# Altium PCB Copy of Copy of PCB3.PcbDoc
Units mil, origin at the board's own origin, x right, y up, seen from the top; angles counter-clockwise.
Board outline 2980 x 1220 mil, 2 copper layers (Top Layer, Bottom Layer); 62 components, 43 nets, 192 pads, 9 vias.
Unrouted connection lines stored in the file: 50.
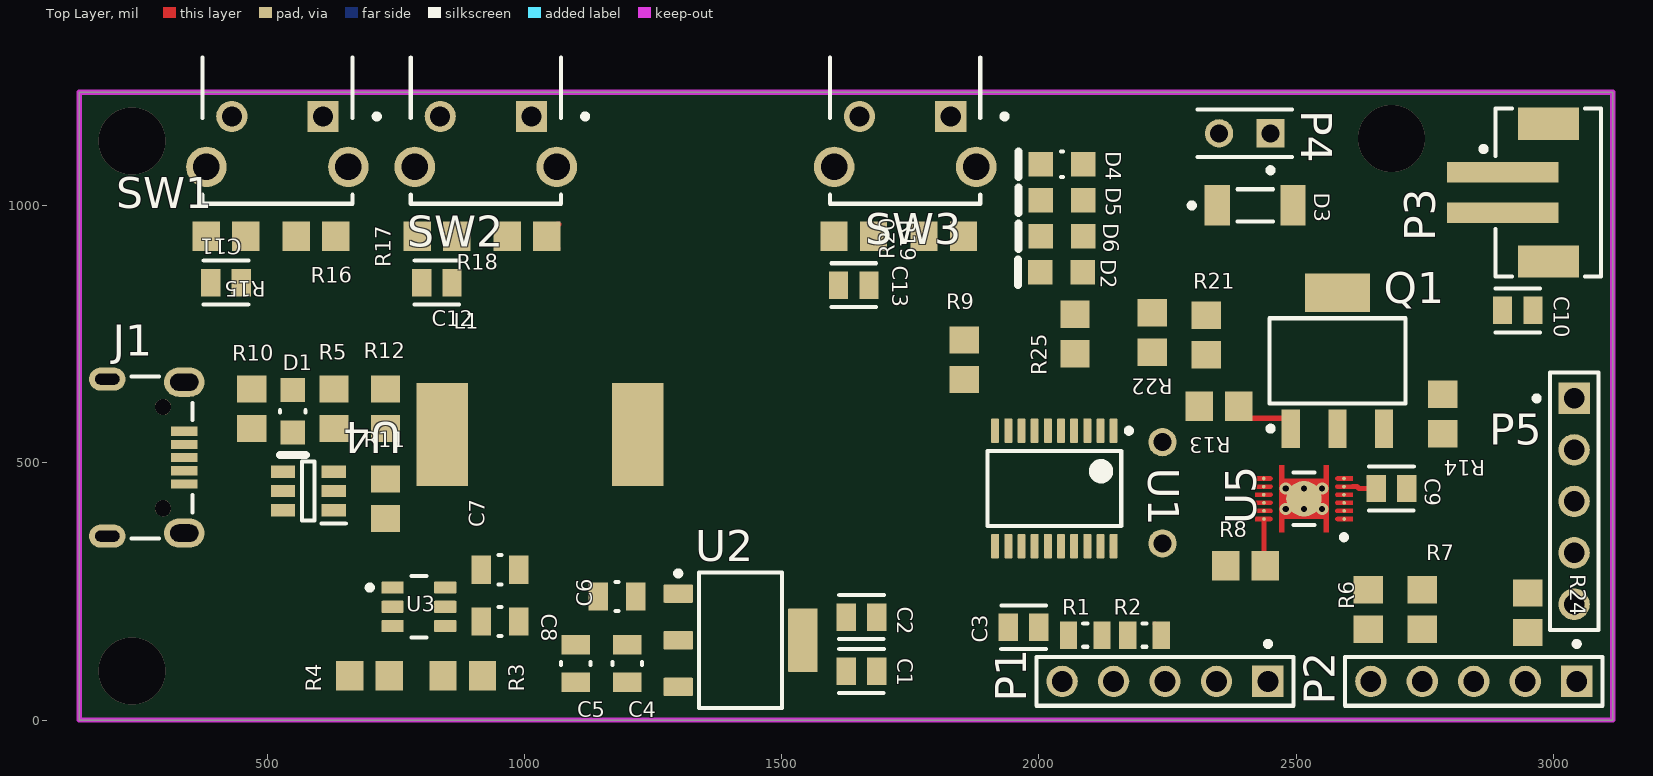
[diagram p0: Top Layer view]
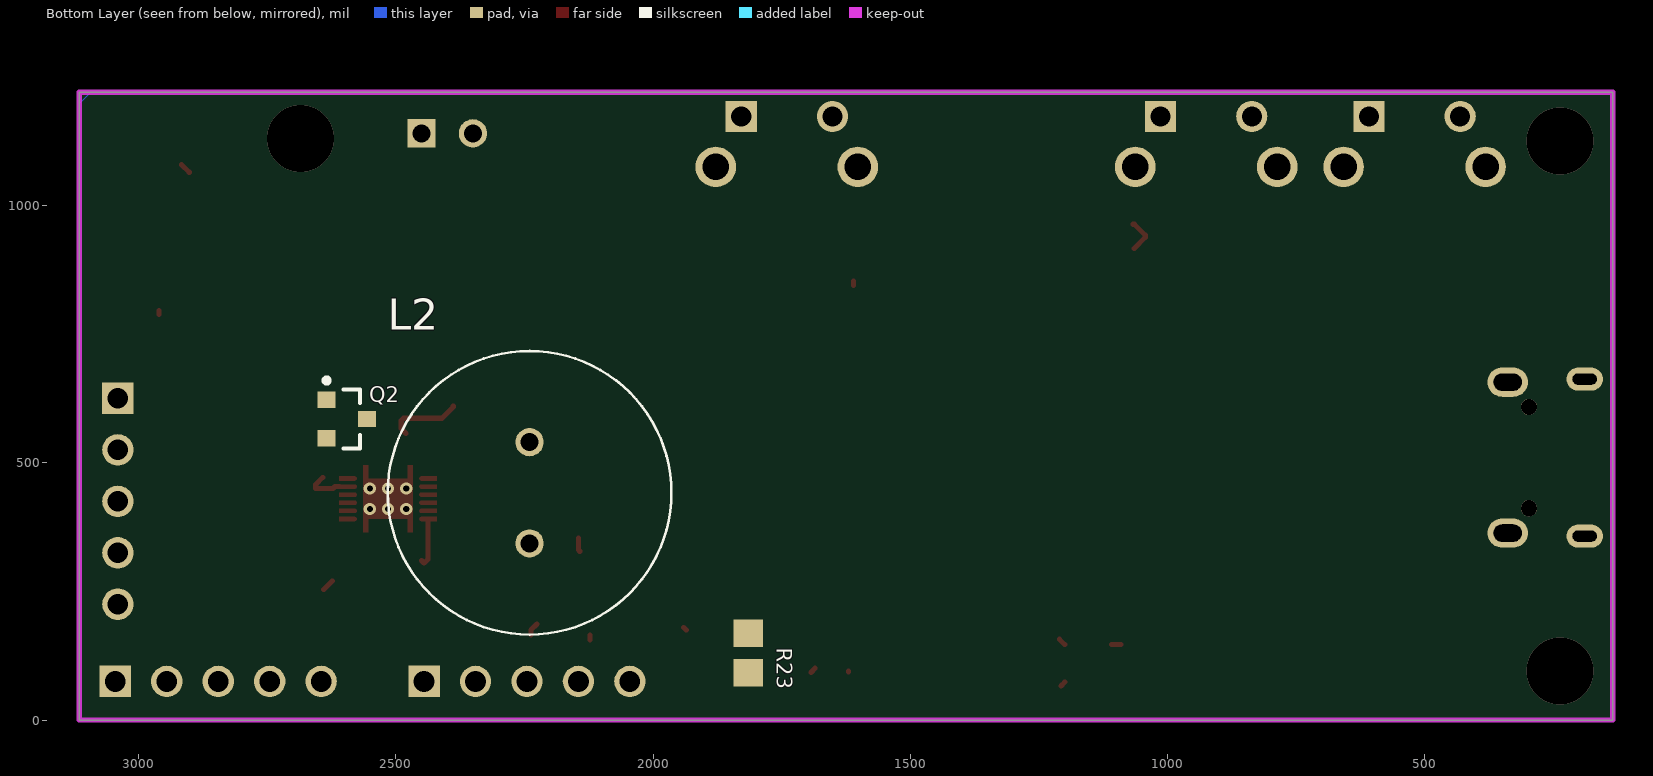
[diagram p1: Bottom Layer view, seen from below]

## Layer stack, top to bottom
Top Solder: solder mask 0.4, Solder Resist, Dk 3.5
Top Layer: signal copper 1.4
Dielectric 1: dielectric 12.6, FR-4, Dk 4.8
Bottom Layer: signal copper 1.4
Bottom Solder: solder mask 0.4, Solder Resist, Dk 3.5

## Board outline
135,0 3115,0 3115,1220 135,1220

## Design rules (kind name [scope] priority, off if disabled: settings)
Clearance [All] p1: gap=8 ignorepadtopadclearanceinfootprint=FALSE except(6: Arc-Arc Arc-Track Arc-SMDPad Arc-THPad Arc-Fill Arc-Poly Arc-Region Track-Track Track-SMDPad Track-THPad Track-Fill Track-Poly Track-Region SMDPad-SMDPad SMDPad-THPad SMDPad-Fill SMDPad-Poly SMDPad-Region THPad-THPad Fill-Fill Fill-Poly Fill-Region Poly-Poly Poly-Region Region-Region; 10: Fill-Hole Poly-Hole Region-Hole)
PolygonConnect [All] p1: connectstyle=Relief reliefconductorwidth=10 reliefentries=4 polygonreliefangle="90 Angle" airgapwidth=10
RoutingVias [All] p1: holewidth=28 width=50 viastyle="Through Hole" minholewidth=12 minwidth=20 maxholewidth=28 maxwidth=50
SolderMaskExpansion [All] p1: expansion=4 istentingtop=FALSE
Width [All] p1: maxlimit=10 minlimit=10 preferedwidth=10
30 further rules are at their usual default settings.

## Classes and differential pairs
component class "Power Supply": C4 C5 C6 C7 C8 L1 R3 R4 U2 U3
component class MotorControl: D3 R13 R14
component class MCU: C1 C2 C3 C11 C12 C13 D4 D5 D6 LS P1 P2 Q2 R1 R2 R15 R16 R17 R18 R19 R20 R22 R24 R25 SW1 SW2 SW3 U1
component class BatteryControl: C9 C10 D1 D2 J1 P3 R5 R6 R7 R8 R9 R10 R11 R12 U4

## Components (designator, comment, footprint, x,y, rotation, side; value= is the part's Value field where it differs from the comment)
C1 "10 uF" FP-C0805C-DG-MFG 1655,95 r180 top value=10uF
C2 "0.1 uF" FP-C0805C-DG-MFG 1655,200 r180 top value=10uF
C3 "1.1 nF" FP-C0805C-DG-MFG 1970,180 r180 top value=10uF
C4 "4.7uF" FP-CC0805-0_85-MFG 1200,110 r90 top value="100 nF"
C5 "470nF" FP-CC0805-0_85-MFG 1100,110 r90 top value="100 nF"
C6 "4.7uF" FP-CC0805-0_85-MFG 1180,240 r180 top value="100 nF"
C7 "1uF" FP-CC0805-0_85-MFG 952.65,292.02 r0 top value="100 nF"
C8 "4.7uF" FP-CC0805-0_85-MFG 952.65,191.46 r180 top value="100 nF"
C9 "0.47 uF" FP-C0805C-DG-MFG 2685,450 r0 top value=10uF
C10 "1 nF" FP-C0805C-DG-MFG 2930.47,796.06 r0 top value=10uF
C11 "0.1uF" FP-C0805C-DG-MFG 420,850 r180 top value=10uF
C12 "0.1uF" FP-C0805C-DG-MFG 830,850 r180 top value=10uF
C13 "0.1uF" FP-C0805C-DG-MFG 1640,845 r180 top value=10uF
D1 "LTST-C170KRKT" LTST-C170KRKT_V 550,600 r270 top
D2 "HSMG-C170" AVAG-HSMX-C170_V 2043.66,870 r180 top
D3 "LS4148-GS18" FP-6_560-5006_01-4-MFG 2420,1000 r0 top value=4pF
D4 "LTST-C170KRKT" LTST-C170KRKT_V 2045,1080 r180 top
D5 "HSMG-C170" AVAG-HSMX-C170_V 2045,1010 r180 top
D6 "HSMG-C170" AVAG-HSMX-C170_V 2045,940 r180 top
J1 "629105150521" 629105150521 225,510 r270 top
L1 "Bourns SRU1048-100Y" "Bourns SRU1048-100Y-Footprint-1" 1030,550 r0 top
L2 "Comment" BUZZER_PS1440P02BT 2240,441.57 r180 bottom locked
P1 "77311-462K05LF" FCI-77311-5_V 2245,75 r180 top
P2 "77311-462K05LF" FCI-77311-5_V 2845,75 r180 top
P3 "620302124022" 620302124022 2990,1025 r90 top
P4 "5-146280-2" TECO-5-146280-2_V 2400,1140 r180 top
P5 "77311-462K05LF" FCI-77311-5_V 3040,425 r270 top
Q1 "BSP89" INF-PG-SOT223_SC-73_M 2580,698.11 r90 top
Q2 "MMBTA06LT1G" ONSC-SOT-23-3-318-08_V 2595,585 r180 bottom
R1 "47k" RESC2013X50X30LL20T20 2090,165 r0 top
R2 "1k" RESC2013X50X30LL20T20 2205,165 r180 top
R3 "Resistor 1k +/-1% 0805 125 mW" RESC2013X70X40ML20T20 880.31,85.97 r0 top value=1M
R4 "Resistor 1k +/-1% 0805 125 mW" RESC2013X70X40ML20T20 699.05,85.97 r0 top value=71.5k
R5 "Resistor 1k +/-1% 0805 125 mW" RESC2013X70X40ML20T20 630,605 r270 top value=470
R6 "Resistor 1k +/-1% 0805 125 mW" RESC2013X70X40ML20T20 2640,215 r90 top value=4.7k
R7 "Resistor 1k +/-1% 0805 125 mW" RESC2013X70X40ML20T20 2745,215 r90 top value=4.7k
R8 "Resistor 1k +/-1% 0805 125 mW" RESC2013X70X40ML20T20 2401.61,300 r180 top value=10k
R9 "Resistor 1k +/-1% 0805 125 mW" RESC2013X70X40ML20T20 1855,700 r270 top value=470
R10 "Resistor 1k +/-1% 0805 125 mW" RESC2013X70X40ML20T20 470,605 r90 top value=10k
R11 "Resistor 1k +/-1% 0805 125 mW" RESC2013X70X40ML20T20 730,430 r90 top value=10k
R12 "Resistor 1k +/-1% 0805 125 mW" RESC2013X70X40ML20T20 730,605 r270 top value=0.01
R13 "Resistor 1k +/-1% 0805 125 mW" RESC2013X70X40ML20T20 2350,610 r180 top value=220
R14 "Resistor 1k +/-1% 0805 125 mW" RESC2013X70X40ML20T20 2785,595 r90 top value=10k
R15 "Resistor 1k +/-1% 0805 125 mW" RESC2013X70X40ML20T20 420,940 r0 top value=10k
R16 "Resistor 1k +/-1% 0805 125 mW" RESC2013X70X40ML20T20 595,940 r0 top value=1k
R17 "Resistor 1k +/-1% 0805 125 mW" RESC2013X70X40ML20T20 830,940 r0 top value=10k
R18 "Resistor 1k +/-1% 0805 125 mW" RESC2013X70X40ML20T20 1005,940 r0 top value=1k
R19 "Resistor 1k +/-1% 0805 125 mW" RESC2013X70X40ML20T20 1640,940 r0 top value=10k
R20 "Resistor 1k +/-1% 0805 125 mW" RESC2013X70X40ML20T20 1815,940 r0 top value=1k
R21 "Resistor 1k +/-1% 0805 125 mW" RESC2013X70X40ML20T20 2325,748.39 r270 top value=470
R22 "Resistor 1k +/-1% 0805 125 mW" RESC2013X70X40ML20T20 2220,753.39 r270 top value=470
R23 "Resistor 1k +/-1% 0805 125 mW" RESC2013X70X40ML20T20 1815,130 r90 bottom value=1k
R24 "Resistor 1k +/-1% 0805 125 mW" RESC2013X70X40ML20T20 2950,208.39 r90 top value=1k
R25 "Resistor 1k +/-1% 0805 125 mW" RESC2013X70X40ML20T20 2070,750 r270 top value=470
SW1 "1825027-5" FP-1825027-5-0 520,1170 r180 top
SW2 "1825027-5" FP-1825027-5-0 925,1170 r180 top
SW3 "1825027-5" FP-1825027-5-0 1740,1170 r180 top
U1 "MSP430G2553IPW20" PW0020A_L 2030,450 r270 top
U2 "LM340MP-5.0/NOPB" DCY0004A_L 1420,155 r0 top
U3 "TLV61046ADBVT" FP-DBV0006A-MFG 795,220 r0 top
U4 "BQ21040DBVT" SOT95P280X145-6N 580,445 r180 top
U5 "BQ27441DRZR-G1A" FP-DRZ0012A-MFG 2515,430 r90 top

## Footprints (in the part's own frame and the unit in brackets; to place one, negate y for a bottom-side part, rotate by r counter-clockwise, add the part's x,y. Pads: shape width x height; smd on the part's side, far side on the other; paste and mask are expansions set on the pad)
620302124022 [mm] "2.00mm SMT Male Vertical Shrouded Header, 2p"
  rect 1x5.5 smd: 1(1,2.25) 2(-1,2.25)
  rect 1.6x3 smd: MP1(-3.4,0) MP2(3.4,0)
  silkscreen extent -4.15,-2.6 4.15,3.32, body extent -4,-2.5 4,4.51, height 6.77
629105150521 [mm] "Micro USB 2.0 SMT Type B Horizontal 5 Contacts High Current"
  rect 0.45x1.3 smd: 1(-1.3,2.9) 2(-0.65,2.9) 3(0,2.9) 4(0.65,2.9) 5(1.3,2.9)
  round 0.8 hole 0.8 unplated: MH1(-2.5,1.85) MH2(2.5,1.85)
  oval 1.15x1.8 hole 0.55 slot 1.2 at 90 deg: Shell(-3.875,-0.9) Shell(3.875,-0.9)
  oval 1.45x2 hole 0.85 slot 1.4 at 90 deg: Shell(-3.725,2.9) Shell(3.725,2.9)
  silkscreen extent -4,0.3 4,3.3, body extent -4,-3.3 4,3.3, height 2.75
AVAG-HSMX-C170_V [mm] "SMD, 2-Leads, Body 2x1.25mm, Height 0.8mm"
  rect 1.2x1.2 smd: 1(-1.05,0) 2(1.05,0)
  silkscreen extent 2.15,-0.63 2.15,0.63, body extent -1,-0.63 1,0.63, height 0.8
"Bourns SRU1048-100Y-Footprint-1" [mil]
  rect 100x200 smd: 1(190,5) 2(-190,5)
  body extent -197,-197 197,197, height 189
BUZZER_PS1440P02BT [mm]
  round 1.398 hole 0.89: 1(0,2.5) 2(0,-2.5)
  silkscreen extent -7,-7 7,7
DCY0004A_L [mm] "SOT223, 4-Leads, Body 6.7x3.7mm, Pitch 2.3mm, IPC High Density"
  rrect11% 1.45x0.9 smd: 1(-3.075,2.3) 2(-3.075,0) 3(-3.075,-2.3)
  rrect7% 1.45x3.15 smd: 4(3.075,0)
  silkscreen extent -3.2,-3.35 2.05,3.42, body extent -3.5,-3.25 3.5,3.25, height 1.62
FCI-77311-5_V [mm] "THD, 5-Leads, Body 12.7x2.4mm, Pitch 2.54mm"
  rect 1.55x1.55 hole 1.02: 1(-5.08,0)
  round 1.55 hole 1.02: 2(-2.54,0) 3(0,0) 4(2.54,0) 5(5.08,0)
  silkscreen extent -6.35,-1.97 6.35,1.2, body extent -6.35,-1.2 6.35,1.2, height 16.24
FP-6_560-5006_01-4-MFG [mm]
  rect 1.25x2 smd paste+0 mask+0: 1(-1.875,0) 2(1.875,0)
  silkscreen extent -3.25,-0.8 0.87,0.8, body extent -2.6,-1.1 2.6,1.1, height 0.25
FP-1825027-5-0 [mm]
  rect 1.54x1.54 hole 0.99 paste-1000 mask+0: 1(-2.25,-0.075)
  round 1.54 hole 0.99 paste-1000 mask+0: 2(2.25,-0.075)
  round 2 hole 1.3 paste-1000 mask+0: 3(-3.505,2.415) 4(3.505,2.415)
  silkscreen extent -5.03,-3 3.7,4.23, body extent -4.6,-4.34 4.6,4.33, height 0.25
FP-C0805C-DG-MFG [mm]
  rect 0.95x1.35 smd paste+0 mask+0: 1(-0.75,0) 2(0.75,0)
  silkscreen extent -1.11,-1.08 1.1,1.07, body extent -1.4,-0.85 1.4,0.85, height 0.25
FP-CC0805-0_85-MFG [mm]
  rect 0.95x1.4 smd paste+0 mask+0: 1(-0.925,0) 2(0.925,0)
  silkscreen extent -0.08,-0.72 0.08,0.72, body extent -1.6,-1.05 1.6,1.05, height 0.25
FP-DBV0006A-MFG [mm]
  rrect17% 1.1x0.6 smd paste+0 mask+0: 1(-1.3,0.95) 2(-1.3,0) 3(-1.3,-0.95) 4(1.3,-0.95) 5(1.3,0) 6(1.3,0.95)
  silkscreen extent -2.55,-1.53 0.38,1.53, body extent -1.95,-1.78 1.95,1.78, height 0.25
FP-DRZ0012A-MFG [mm]
  round 0.18 smd paste-1000 mask+0: 1(-1,-1.985) 2(-0.6,-1.985) 3(-0.2,-1.985) 4(0.2,-1.975) 5(0.6,-1.975) 6(1,-1.975) 7(1,1.985) 8(0.6,1.985) 9(0.2,1.985) 10(-0.2,1.975) 11(-0.6,1.975) 12(-1,1.975)
  round 1.755 smd paste-1000 mask+0: 13(0,0)
  Top Layer region: -1.1,-2.4 -1.1,-1.65 -1.092,-1.612 -1.071,-1.579 -1.038,-1.558 -1,-1.55 -1,-1.55 -0.962,-1.558 -0.929,-1.579 -0.908,-1.612 -0.9,-1.65 -0.9,-1.65 -0.9,-2.4
  Top Layer region: -0.7,-2.4 -0.7,-1.65 -0.692,-1.612 -0.671,-1.579 -0.638,-1.558 -0.6,-1.55 -0.6,-1.55 -0.562,-1.558 -0.529,-1.579 -0.508,-1.612 -0.5,-1.65 -0.5,-1.65 -0.5,-2.4
  Top Layer region: -0.3,-2.4 -0.3,-1.65 -0.292,-1.612 -0.271,-1.579 -0.238,-1.558 -0.2,-1.55 -0.2,-1.55 -0.162,-1.558 -0.129,-1.579 -0.108,-1.612 -0.1,-1.65 -0.1,-1.65 -0.1,-2.4
  Top Layer region: 0.1,-2.4 0.1,-1.65 0.108,-1.612 0.129,-1.579 0.162,-1.558 0.2,-1.55 0.2,-1.55 0.238,-1.558 0.271,-1.579 0.292,-1.612 0.3,-1.65 0.3,-1.65 0.3,-2.4
  Top Layer region: 0.5,-2.4 0.5,-1.65 0.508,-1.612 0.529,-1.579 0.562,-1.558 0.6,-1.55 0.6,-1.55 0.638,-1.558 0.671,-1.579 0.692,-1.612 0.7,-1.65 0.7,-1.65 0.7,-2.4
  Top Layer region: 0.9,-2.4 0.9,-1.65 0.908,-1.612 0.929,-1.579 0.962,-1.558 1,-1.55 1,-1.55 1.038,-1.558 1.071,-1.579 1.092,-1.612 1.1,-1.65 1.1,-1.65 1.1,-2.4
  Top Layer region: 1.1,2.4 1.1,1.65 1.087,1.6 1.05,1.563 1,1.55 1,1.55 0.962,1.558 0.929,1.579 0.908,1.612 0.9,1.65 0.9,1.65 0.9,2.4
  Top Layer region: 0.7,2.4 0.7,1.65 0.687,1.6 0.65,1.563 0.6,1.55 0.6,1.55 0.562,1.558 0.529,1.579 0.508,1.612 0.5,1.65 0.5,1.65 0.5,2.4
  Top Layer region: 0.3,2.4 0.3,1.65 0.287,1.6 0.25,1.563 0.2,1.55 0.2,1.55 0.162,1.558 0.129,1.579 0.108,1.612 0.1,1.65 0.1,1.65 0.1,2.4
  Top Layer region: -0.1,2.4 -0.1,1.65 -0.113,1.6 -0.15,1.563 -0.2,1.55 -0.2,1.55 -0.238,1.558 -0.271,1.579 -0.292,1.612 -0.3,1.65 -0.3,1.65 -0.3,2.4
  Top Layer region: -0.5,2.4 -0.5,1.65 -0.513,1.6 -0.55,1.563 -0.6,1.55 -0.6,1.55 -0.638,1.558 -0.671,1.579 -0.692,1.612 -0.7,1.65 -0.7,1.65 -0.7,2.4
  Top Layer region: -0.9,2.4 -0.9,1.65 -0.913,1.6 -0.95,1.563 -1,1.55 -1,1.55 -1.038,1.558 -1.071,1.579 -1.092,1.612 -1.1,1.65 -1.1,1.65 -1.1,2.4
  Top Layer region: -1.65,1.225 1.65,1.225 1.65,0.975 0.975,0.975 0.975,-0.975 1.65,-0.975 1.65,-1.225 -1.65,-1.225 -1.65,-0.975 -0.975,-0.975 -0.975,0.975 -1.65,0.975 -1.65,1.225
  silkscreen extent -2.02,-2.1 1.3,0.53, body extent -1.75,-2.5 1.75,2.5, height 0.25
INF-PG-SOT223_SC-73_M [mm] "SOT223, 4-Leads, Body 6.5x3.5mm, Pitch 2.3mm, IPC Low Density"
  rect 1.9x0.9 smd: 1(-3.35,2.3) 2(-3.35,0) 3(-3.35,-2.3)
  rect 1.9x3.2 smd: 4(3.35,0)
  silkscreen extent -3.47,-3.35 2.1,3.42, body extent -1.85,-3.35 1.85,3.35, height 1.8
LTST-C170KRKT_V [mm] "SMD, 2-Leads, Body 2x1.25mm"
  rect 1.2x1.2 smd: 1(-1.05,0) 2(1.05,0)
  silkscreen extent -0.05,-0.63 2.16,0.64, body extent -1,-0.63 1,0.63, height 1.2
ONSC-SOT-23-3-318-08_V [mm] "SOT23, 3-Leads, Body 2.92x1.3mm, Pitch 0.95mm"
  rect 0.9x0.8 smd: 1(-1,0.95) 2(-1,-0.95) 3(1,0)
  silkscreen extent -1.13,-1.46 0.65,2.02, body extent -0.65,-1.46 0.65,1.46, height 1.11
PW0020A_L [mm] "SOP, 20-Leads, Body 6.6x4.5mm, Pitch 0.65mm, IPC High Density"
  rrect25% 1.2x0.4 smd: 1(-2.85,2.925) 2(-2.85,2.275) 3(-2.85,1.625) 4(-2.85,0.975) 5(-2.85,0.325) 6(-2.85,-0.325) 7(-2.85,-0.975) 8(-2.85,-1.625) 9(-2.85,-2.275) 10(-2.85,-2.925) 11(2.85,-2.925) 12(2.85,-2.275) 13(2.85,-1.625) 14(2.85,-0.975) 15(2.85,-0.325) 16(2.85,0.325) 17(2.85,0.975) 18(2.85,1.625) 19(2.85,2.275) 20(2.85,2.925)
  silkscreen extent -2.97,-3.3 1.85,3.8, body extent -3.21,-3.25 3.21,3.25, height 1
RESC2013X50X30LL20T20 [mm] "Chip Resistor, 2-Leads, Body 2.00x1.25mm, IPC High Density"
  rect 0.85x1.35 smd: 1(-0.825,0) 2(0.825,0)
  silkscreen extent -0.1,-0.58 0.1,0.58, body extent -1.1,-0.72 1.1,0.72, height 0.5
RESC2013X70X40ML20T20 [mm] "Chip Resistor, 2-Leads, Body 2.2x1.35mm, IPC Low Density"
  rect 1.35x1.45 smd: 1(-0.975,0) 2(0.975,0)
  body extent -1.1,-0.67 1.1,0.67, height 0.7
SOT95P280X145-6N [mm]
  rect 1.2x0.6 smd: 1(-1.25,0.95) 2(-1.25,0) 3(-1.25,-0.95) 4(1.25,-0.95) 5(1.25,0) 6(1.25,0.95)
  silkscreen extent -1.85,-1.45 0.3,1.6, body extent -1.4,-1.45 1.4,1.45, height 1.45
TECO-5-146280-2_V [mm] "Connector, 2-Leads, Body 4.67x2.34mm, Pitch 2.54mm"
  rect 1.4x1.4 hole 0.89: 1(-1.27,0)
  round 1.4 hole 0.89: 2(1.27,0)
  silkscreen extent -2.33,-1.17 2.33,1.94, body extent -2.34,-1.17 2.34,1.17, height 5.33

## Part data
C1 C2 C3 C9 C10 C11 C12 C13: library part CMP-2007-03243-2, "CAP CER 10UF 10V X5R 0805", 3DS Part Number=220-00001, Capacitance=10uF, Manufacturer=Kemet, Manufacturer Part Number=C0805C106K8PACTU, Package=C0805C-DG, Temperature="-55°C to +85°C", Temperature Characteristic=X5R, Temperature Coefficient=15%, Temperature Range High=+85°C, Temperature Range Low=-55°C, Tolerance=10%, Voltage=10V, Automotive=No, Category=Cap, ComponentLink2Description=Datasheet, ComponentLink2URL=https://content.kemet.com/datasheets/KEM_C1006_X5R_SMD.pdf, Device Class L1="Passive Components", Device Class L2=Capacitors, Device Class L3="Ceramic Capacitors", Digikey Description="CAP CER 10UF 10V X5R 0805", Height=1.4mm, Ipc Land Pattern Name=CAPC200125X125, Lead Free=Yes, Material=Ceramic, Mouser Description="CAP CER 10UF 10V X5R 0805", Octopart=https://octopart.com/c0805c106k8pactu-kemet-98697, RoHS=TRUE, Voltage Rating=10V
C4 C5 C6 C7 C8: library part CMP-03422-000499-1, "CAP CER 0.1UF 50V X7R 0805", Capacitance="100 nF", Manufacturer=Yageo, Manufacturer Part Number=CC0805KRX7R9BB104, Package=CC0805-0.85, Temperature="-30°C to +85°C", Temperature Characteristic=X7R, Temperature Range High=+85°C, Temperature Range Low=-30°C, Tolerance=0.1, Voltage Rating="50 V", Automotive=No, Category=Cap, ComponentLink2Description=Datasheet, ComponentLink2URL=http://www.yageo.com/documents/recent/UPY-GPHC_Y5V_6.3V-to-50V_8.pdf, Device Class L1="Passive Components", Device Class L2=Capacitors, Device Class L3="Ceramic Capacitors", Digikey Description="CAP CER 0.1UF 50V X7R 0805", Footprint Url=http://www.yageo.com/exep/pages/download/literatures/UPY-C_GEN_24.pdf, Height=0.95mm, Ipc Land Pattern Name=CAPC200125X85, Lead Free=Yes, Material=Ceramic, Mouser Description="Multilayer Ceramic Capacitors MLCC - SMD/SMT 100nF 50V X7R 10%", Octopart=https://octopart.com/cc0805krx7r9bb104-yageo-192993, RoHS=TRUE
D1 D4: library part CMP-2000-07593-1, "LED Red, 75 mW, 54 mcd, -55 to 85 degC, 2-Pin SMD, RoHS, Tape and Reel", Case Code (Imperial)=0805, Case Code (Metric)=2012, Colour=Red, Forward Current=30mA, Forward Voltage=2V, Lens Colour=Colorless, Manufacturer=Lite-On, Max Operating Temperature=85degC, Min Operating Temperature=-55degC, Package Description="2-Pin Surface Mount Device, Body 2 x 1.25 mm", Package Quantity=1, Package Reference=C170KRKT, Power Dissipation=75mW, Test Current=20mA, Case\/Package=0805, Datasheet URL=http://optoelectronics.liteon.com/upload/download/DS-22-99-0150/LTST-C170KRKT.pdf, Datasheet Version="Rev. D, 11/2014", Depth=1.6mm, Dominant Wavelength=631nm, Height=1.1mm, Illumination Colour=Red, Lead Free=LeadFree, Length=3.2mm, Lens Style=Rectangular, Lens Transparency=Clear, Luminous Intensity=54mcd, Manufacturer URL=http://www.us.liteon.com/, Mount=SurfaceMount, Mounting Technology=SurfaceMount, Number of Elements=1, Number of LEDs=1, Number of Pins=2, Packaging=TapeandReel, Power Rating=75mW, Radiation Hardening=No, RoHSCompliant=True, Viewing Angle=130degrees, Wavelength=639nm, Width=1.25mm
D2 D5 D6: library part CMP-2000-05062-1, "Chip LED, Green, 2.2 V, -40 to 85 degC, 2-Pin SMD, Pb-Free, Tape and Reel", Forward Current If=20mA, Forward Voltage=2.2V, Forward Voltage VF Max=2.6V, LED Colour=Green, Manufacturer=Avago, Operating Temperature Max=85degC, Operating Temperature Min=-30degC, Operating Temperature Range=-30degCto+85degC, Opto Case Style=SMD, Package Description="2-Pin Surface Mount Device, Body 2 x 1.25 mm, Height 0.8 mm", Package Reference=HSMX-C170, Storage Temperature Min=-40degC, Bulb Size=1.25mmx1.4mm, Datasheet URL=https://datasheet.ciiva.com/29280/180495-da-01-en-chip-led-hsmg-c170-gelb-gruen-29280971.pdf, Datasheet Version=Oct-08, Dominant Wavelength=572nm, Dominant Wavelength Typ=572nm, External Depth=0.8mm, External Length / Height=2mm, External Width=1.25mm, Forward Current If Max=20mA, LED Mounting=SMD, LED Type=Standard, Lens Shape=Rectangular, Light Area Height=1mm, Luminous Intensity=15mcd, Luminous Intensity Min=4mcd, Luminous Intensity Typ=15mcd, Manufacturer URL=http://www.avagotech.com/, Mounting Type=SMD, MSL=MSL2A-4weeks, No. of Pins=2, Opto Mounting Orientation=Top, Packaging=CutTape, Peak Forward Current=20mA, Peak Wavelength=570nm, PIV Max=5V, Storage Temperature Max=85degC, SVHC=NoSVHC(16-Jun-2014), Viewing Angle=170deg, Voltage Vf Typ=2.2V, Wavelength Typ=570nm
D3: library part CMP-02539-000014-1, "DIODE GEN PURP 75V 150MA SOD80", Capacitance=4pF, Forward Current=300mA, Manufacturer=Vishay, Max Junction Temp=+175°C, Max Repetitive Reverse Voltage=100V, Max Surge Forward Current=2A, Package=6.560-5006.01-4, Peak Reverse Current=5uA, Reverse Voltage=75V, Temperature="to +175°C", Automotive=Yes, Automotive Grade="Grade 0", Category=Diode, ComponentLink2Description=Datasheet, ComponentLink2URL=http://www.vishay.com/docs/85561/ls4148.pdf, Device Class L1="Discrete Semiconductors", Device Class L2=Diodes, Device Class L3="Schottky Diodes", Digikey Description="DIODE GEN PURP 75V 150MA SOD80", Height=1.7mm, Lead Free=Yes, Manufacturer Part Number=LS4148-GS18, Mouser Description="In a Pack of 100, Vishay Switching Diode, 300mA 75V, 2-Pin SOD-80 LS4148-GS18", Octopart=https://octopart.com/ls4148-gs18-vishay-55507867, RoHS=TRUE, Temperature Range High=+175°C
J1: library part CMP-1502-03252-1, "Micro USB 2.0 Type B Receptacle WR-COM, Horizontal, SMT, with Pegs, High Current at Pin 1 & Pin 5", Contact Resistance=30mOhm, Manufacturer="Wurth Elektronik", Operating Temperature=-40to85degC, Rated Current=3A, Working Voltage=30VAC, Connector Type=MicroUSB2.0TypeB, Datasheet URL=https://katalog.we-online.de/em/datasheet/629105150521.pdf, Gender=Receptacle, Manufacturer URL=http://www.we-online.de, Mounting Technology=SMT, Orientation=Horizontal, Package Reference=629105150521, Packaging=TapeandReel, Part Number=629105150521, Publisher=WurthElektronik
L1: library part CMP-006-00021-1, "Inductor"
P1 P2 P5: library part CMP-1698-00006-1, "Male Header, Pitch 2.54 mm, 1 x 5 Position, Height 16.24 mm, Tail Length 3.05 mm,  / -65 to 125 degC, RoHS, Tape and Reel", Current Rating="1 A", Max Operating Temperature=85degC, Min Operating Temperature=-25degC, Package Quantity=500, ComponentLink1Description="Manufacturer URL", ComponentLink1URL=http://portal.fciconnect.com/, ComponentLink2Description=Datasheet, ComponentLink2URL=http://portal.fciconnect.com/Comergent//fci/drawing/77311.pdf, Contact Material=Brass, DatasheetVersion="Rev. CK, 07/2016", Gender=Female, PackageDescription="Male Header, Pitch 2.54 mm, 1 x 5 Position, Height 16.24 mm, Tail Length 3.05 mm", PackageReference=77311-5, Packaging="Tape and Reel", RoHSCompliant=True, Shielding=Shielded
P3: library part CMP-1502-00660-1, "Male Shrouded Header WR-WTB, SMT, Vertical, pitch 2 mm, 1 x 2 position", Contact Resistance=20mOhm, Manufacturer="Wurth Elektronik", Operating Temperature=-25to85degC, Working Voltage=100VAC, Datasheet URL=https://katalog.we-online.de/em/datasheet/6203xx124022.pdf, Gender=Male, Manufacturer URL=http://www.we-online.de, Mounting Technology=SMT, Orientation=Vertical, Package Reference=620302124022, Packaging=TapeandReel, Part Number=620302124022, Pitch=2mm, Position=1x2, Publisher=WurthElektronik
P4: library part CMP-2000-07492-1, "Male Header, Pitch 2.54 mm, 1 x 2 Position, Height 8.21 mm, Tail Length 3.05 mm, -65 to 105 degC, RoHS, Bulk", Case\/Package=100, Colour=Black, Current Rating=3A, Flammability Rating=UL94V-0, High Temperature Housing=Yes, Manufacturer="TE Connectivity", Max Current Rating=5A, Max Operating Temperature=105degC, Min Operating Temperature=-65degC, Package Description="Male Header, Pitch 2.54 mm, 1 x 2 Position, Height 8.21 mm, Tail Length 3.05 mm", Package Quantity=500, Approvals=CSA, Board Standoff=No(Without), Connector Type=Header, Contact Gender=Male, Contact Material=CopperAlloy, Contact Mating Length=0.23inch, Contact Plating=Matte, Contact Protection=No(Without), Contact Shape=Square, Datasheet URL=http://www.te.com/commerce/DocumentDelivery/DDEController?Action=showdoc&DocId=Customer+Drawing%7F146280%7FH1%7Fpdf%7FEnglish%7FENG_CD_146280_H1.pdf%7F5-146280-2, Datasheet Version="Rev. H1, 08/2016", Depth=2.34mm, Gasket=No(Without), High Speed Serial Data Connector=No, Housing Colour=Black, Housing Material=Polymer, Keyed=No, Length=4.67mm, Manufacturer URL=http://www.te.com/, Mating Alignment=No(Without), Mating Connector Lock=No(Without), Mating Post Length=0.23inch, Mount=ThroughHole, Mounting Technology=ThroughHole, Number of Contacts=2, Number of Positions=2, Number of Rows=1, Orientation=Straight, Package Reference=5-146280-2, Packaging=Carton, Panel Mount Retention=No(Without), PCB Mount Retention=Without, PCB Mounting Orientation=Vertical, PCB Thickness=0.063inch, Pitch=2.54mm, Radiation Hardening=No, RoHSCompliant=true, Row Spacing=2.54mm, Selectively Loaded=No(Without), Stabilizers=No(Without), Termination=ThroughHole, Termination Post Length=0.12inch
Q1: library part CMP-1149-00010-1, "N-Channel SIPMOS Small-Signal-Transistor, 240 V VDS, 0.35 A ID, -55 to 150 degC, PG-SOT223 (SC-73), Reel, Green", Manufacturer=Infineon, ComponentLink1Description="Manufacturer URL", ComponentLink1URL=http://www.infineon.com/, ComponentLink2Description=Datasheet, ComponentLink2URL=http://www.infineon.com/dgdl/BSP89_Rev2.2.pdf?folderId=db3a3043156fd573011622e10b5c1f67&fileId=db3a30433b47825b013b4b8a07f90d55, ComponentLink3Description="Package Specification", ComponentLink3URL=http://www.infineon.com/dgdl/SOT223-Package_Overview.pdf?folderId=db3a30431936bc4b0119530470b03c3d&fileId=db3a30431936bc4b0119531d40b93c5c, DatasheetVersion="Rev. 2.2", Green=TRUE, Halogen-free=TRUE, ID (max)="0.35Â A", IDpuls (max)="1.4Â A", Mode=Enhancement, Mounting Technology="Surface Mount", PackageDescription="4-Pin Small Outline Transistor Package, 6.5 x 3.5 mm Body, 2.3 mm Pitch", PackageReference="PG-SOT223 (SC-73)", PackageVersion=Apr-08, Packing=Reel, PartNumber=BSP89, Polarity=N, Ptot (max)="1.8Â W", QG="4.3Â nC", RDS (on) (max)="6,000 mOhm", RDS (on) (max) (@4.5V)="7,500 mOhm", RthJA (max)="115 K/W", VDS (max)="240 V", VGS(th) (max)="1.8Â V", VGS(th) (min)="0.8Â V"
Q2: library part CMP-1048-00619-1, "Driver Transistor, NPN Silicon, 3-Pin SOT-23, Pb-Free, Tape and Reel", Manufacturer="On Semiconductor", ComponentLink1Description="Manufacturer URL", ComponentLink1URL=http://www.onsemi.com/, ComponentLink2Description=Datasheet, ComponentLink2URL=http://www.onsemi.cn/pub_link/Collateral/MMBTA05LT1-D.PDF, ComponentLink3Description="Package Specification", ComponentLink3URL=http://www.onsemi.cn/pub_link/Collateral/318-08.PDF, DatasheetVersion="Rev. 8", fT Min (MHz)=100, IC Continuous (A)=0.5, Mounting Technology="Surface Mount", PackageDescription="3-Pin Small Outline Transistor, Body 2.92 x 1.3 mm, Pitch 0.95 mm", PackageReference=SOT-23-3-318-08, PackageVersion="Rev. AP, 11/2009", Packing="Tape and Reel", PartNumber=MMBTA06LT1G, Polarity=NPN, RoHS=TRUE
R1 R2: library part CMP-2001-04896-1, Manufacturer="Vishay Dale", Part Number=CRCW08050000Z0EA
R3 R4 R5 R6 R7 R8 R9 R10 R11 R12 R13 R14 R15 R16 R17 R18 R19 R20 R21 R22 R23 R24 R25: library part CMP-009-00010-4, "Chip Resistor, 1 KOhm, +/- 1%, 0.125 W, -55 to 155 degC, 0805 (2013 Metric)", Case/Package=0805, Max Operating Temperature=155°C, Min Operating Temperature=-55°C, Power=125mW, Tolerance=1%, Voltage Rating=150V, Mounting Technology=SM, Pins=2, RoHS Compliant=True
SW1 SW2 SW3: library part CMP-2000-05514-2, "SWITCH TACTILE SPST-NO 0.05A 24V", Contact Current Rating=50mA, Contact Resistance=100mΩ, Manufacturer="TE Connectivity", Operating Force=160gf, Temperature="-35°C to +85°C", Temperature Range High=+85°C, Temperature Range Low=-35°C, Voltage Rating Dc=24V, Automotive=No, Category=Switch, ComponentLink2Description=Datasheet, ComponentLink2URL=https://www.te.com/commerce/DocumentDelivery/DDEController?Action=showdoc&DocId=Customer+Drawing%7F1825027%7FG4%7Fpdf%7FEnglish%7FENG_CD_1825027_G4.pdf%7F1825027-5, Device Class L1=Electromechanical, Device Class L2=Switches, Device Class L3="Pushbutton Switches", Digikey Description="SWITCH TACTILE SPST-NO 0.05A 24V", Electromechanical Life=100000Cycles, Height=7.31mm, Lead Free=Yes, Manufacturer Part Number=1825027-5, Mount="Through Hole", Mouser Description="Tactile Switches R/A TACT 160G PB SWITCH", Octopart=https://octopart.com/1825027-5-te+connectivity-46510878, Package=1825027-5, RoHS=TRUE, Throw Configuration=SPST-NO
U1: library part CMP-0365-00585-2, "16 MHz Mixed Signal Microcontroller with 16 KB Flash, 512 B SRAM and 24 GPIOs, -40 to 85 degC, 20-pin SOP (PW), Green (RoHS & no Sb/Br)", Frequency(MHz)=16, Manufacturer="Texas Instruments", Temp Sensor=Yes, ADC="10-bit SAR", ADC Channels=8, Brown Out Reset=Yes, Cap touch I/O=Yes, Code_JEDEC=MO-153, Comparators=Yes, ComponentLink1Description="Manufacturer URL", ComponentLink1URL=http://www.ti.com/, ComponentLink2Description=Datasheet, ComponentLink2URL=http://www.ti.com/general/docs/lit/getliterature.tsp?genericPartNumber=MSP430G2553&fileType=pdf, ComponentLink3Description="Package Specification", ComponentLink3URL=http://www.ti.com.cn/cn/lit/ml/mpds362/mpds362.pdf, DatasheetVersion=SLAS735G, Eco-Plan="Green (RoHS & no Sb/Br)", Flash(KB)=16, GPIO=24, Mounting Technology="Surface Mount", PackageDescription="20-Pin Plastic Small Outline, Body 6.5 x 4.4 mm, 0.65 mm Pitch", PackageReference=PW0020A, PackageVersion=4040064-5/G, PartNumber=MSP430G2553IPW20, SRAM(B)=512, SubFamily="Value Line", Timers - 16-bit=2, USCI_A (UART/LIN/IrDA/SPI)=1, USCI_B (I2C & SPI)=1, Watchdog=Yes
U2: library part CMP-0062-01784-3, "Series 3-Terminal Positive Regulators, 4-pin SOT-223, Pb-Free", Manufacturer="Texas Instruments", PackageTopMarking=XYTT*N00A, PowerWise=N, Code_IPC=SOT223-4, Code_JEDEC=TO-261-AA, ComponentLink1Description="Datasheet URL", ComponentLink1URL=http://www.ti.com/general/docs/lit/getliterature.tsp?genericPartNumber=LM340-N&fileType=pdf, CompType="LDO IC", PackageDescription="Molded SOT-223, 6.50 x 3.56 x 1.6mm Body, 4 Lead, 2.3mm Pitch", PackageReference=DCY0004A, PinCount=4, RoHS=Y
U3: library part CMP-04918-000055-1, "IC REG BOOST ADJ SOT23-6", Manufacturer="Texas Instruments", Max Junction Temp=+125°C, Max Supply Voltage=5.5V, Min Supply Voltage=1.8V, Nominal Supply Current=110uA, Output Current=980mA, Output Voltage=3.3-28V, Package=DBV0006A, Switching Frequency=1050kHz, Temperature="-40°C to +125°C", Temperature Range Low=-40°C, Automotive=No, Category=IC, ComponentLink2Description=Datasheet, ComponentLink2URL=http://www.ti.com/lit/ds/symlink/tlv61046a.pdf, Device Class L1="Integrated Circuits (ICs)", Device Class L2="Power Management ICs", Device Class L3="Voltage Regulators - Switching", Digikey Description="IC REG BOOST ADJ SOT23-6", Height=1.45mm, Ipc Land Pattern Name=SOT95P280X145-6, Lead Free=Yes, Manufacturer Part Number=TLV61046ADBVT, Max Duty Cycle=90%, Number Of Outputs=1, Octopart=https://octopart.com/tlv61046adbvt-texas+instruments-81856327, Output Type=AdjustableProgrammable, RoHS=TRUE, Standoff Height=0mm, Switching Topology=Boost, Temperature Range High=+125°C
U4: "Integrated Circuit", Manufacturer_Name="Texas Instruments", Mouser Part Number=595-BQ21040DBVT, Arrow Part Number=BQ21040DBVT, Arrow Price/Stock=https://www.arrow.com/en/products/bq21040dbvt/texas-instruments, Datasheet Link=http://www.ti.com/lit/gpn/bq21040, Height=1.45mm, Manufacturer_Part_Number=BQ21040DBVT, Mouser Price/Stock=https://www.mouser.co.uk/ProductDetail/Texas-Instruments/BQ21040DBVT/?qs=cttFivMKqWxXmJjs8S2Pcw%3D%3D
U5: library part CMP-04911-000008-1, "IC BATT FUEL GAUGE LI-ION 12SON", Ambient Temperature Range High=+85°C, Ambient Temperature Range Low=-40°C, Manufacturer="Texas Instruments", Max Supply Voltage=4.5V, Min Supply Voltage=2.45V, Nominal Supply Current=93uA, Output Voltage=1.8V, Package=DRZ0012A, Temperature="-40°C to +85°C", Automotive=No, Category=IC, ComponentLink2Description=Datasheet, ComponentLink2URL=http://www.ti.com/lit/gpn/bq27441-g1, Device Class L1="Integrated Circuits (ICs)", Device Class L2="Power Management ICs", Device Class L3="Battery Management", Digikey Description="IC BATT FUEL GAUGE LI-ION 12SON", Height=1mm, Lead Free=Yes, Manufacturer Part Number=BQ27441DRZR-G1A, Mouser Description="System-Side Impedance Track? Battery Fuel (Gas) Gauge 12-SON -40 to 85", Number Of Cells=1, Number Of Outputs=1, Octopart=https://octopart.com/bq27441drzr-g1a-texas+instruments-30555829, RoHS=TRUE, Standoff Height=0mm, Temperature Range High=+85°C, Temperature Range Low=-40°C

## Via types
v1: diameter 23.62, hole 11.81, Top Layer to Bottom Layer, 6 vias
v2: diameter 130, hole 130, Top Layer to Bottom Layer, 3 vias

## Nets (pads, with @x,y where several pads share a name; then routed paths per layer and width w, separated by ;. In a path a pad name is that pad's centre, name@x,y a point inside that pad or via, vN(x,y) a via of type N, cw(c..) or ccw(c..) an arc to the next point about the centre after c; other vN are vias at no path point)
+3.3V: C4.1 C5.1 U2.3 | length 10.3
  Top Layer w10: C4.1 C4.1@1207.29,66.29
+3V3: C1.1 C2.1 L2.1 P1.1 R1.2 R6.2 R7.2 R8.2 R15.1 R17.1 R19.1 R23.1 U1.1 | length 52
  Top Layer w10: C1.1@1685,100.47 C1.1@1693.23,92.24 ; R1.2@2122.48,155.16 R1.2 ; R6.2@2623.39,270 R6.2
  Bottom Layer w10: P1.1 P1.1@2450,80
+5V: J1.1 U4.6
+12V: C8.2 D3.1 P4.2 R3.2 U3.5
+BATT: C10.1 P3.2 R12.1 U5.6 U5.8
CHG: D1.2 U4.3
"CTL FAN": P1.5 R13.2 U1.2
GND: C1.2 C2.2 C3.2 C4.2 C5.2 C6.2 C7.2 C8.1 C9.2 C10.2 C11.2 C12.2 C13.2 D2.2 D4.2 D5.2 D6.2 J1.5 P1.2 P3.1 Q2.2 R2.1 R4.1 R10.2 R11.2 R14.1 R16.2 R18.2 R20.2 U1.20 U2.2 U2.4 U3.2 U4.5 U5.3 | length 197.4
  Top Layer w10: R18.2@1064.96,916.46 1043.39,938.03 R18.2 1043.39,941.97 1064.96,963.54 R18.2@1066.93,963.54 ; C5.2@1091.14,146.41 C5.2 C5.2@1108.86,146.41 ; C4.2 C4.2@1210.43,156.84 ; C13.2 C13.2@1610.47,852.87 ; C1.2@1620.47,93.7 C1.2@1620.47,95 ; C3.2@1935.47,175 C3.2 ; U1.20@2142.28,328.03 2145.16,330.91 U1.20 U1.20@2145.16,353.54 ; R2.1@2225.75,186.57 2237.48,174.84 R2.1 ; P3.1 P3.1@2916.1,1079.06 ; C10.2@2960,788.19 C10.2
GPBATT: R8.1 U5.12 | length 95.8
  Top Layer w10: U5.12 2437.24,312.48 2444.86,304.86 R8.1@2449.72,309.72
"I2C SCL": P2.4 R7.1 U1.9 U5.2
"I2C SDA": P2.5 R6.1 U1.10 U5.1
NetC9_1: C9.1 U5.5 | length 74.7
  Top Layer w10: 2609.49,453.62 2618.15,453.62 2621.77,450 C9.1 2655.47,457.87 C9.1@2641.77,471.57
NetD1_1: D1.1 R5.1
NetD2_1: D2.1 R9.1
NetD3_2: D3.2 P4.1 Q1.2 Q1.4
NetD4_1: D4.1 R21.1
NetD5_1: D5.1 R22.1
NetD6_1: D6.1 R25.1
NetL1_2: L1.2 U3.1
NetQ1_1: Q1.1 R13.1 | length 143.3
  Top Layer w10: R13.1 2388.39,608.03 2409.96,586.46 2485.28,586.46 2489.45,582.28 Q1.1 Q1.1@2479.84,556.61
NetQ1_3: Q1.3 R14.2
NetQ2_1: Q2.1 R24.2
NetQ2_3: L2.2 Q2.3 R23.2
NetR3_1: R3.1 R4.2 U3.3
NetR10_1: R10.1 U4.4
NetR11_1: R11.1 U4.1
NetR16_1: R16.1 SW1.1
NetR18_1: R18.1 SW2.1
NetR20_1: R20.1 SW3.1
P1.1: P2.1 R21.2 U1.3
P1.2: P5.1 U1.4
P1.3: P2.2 R22.2 U1.5
P1.4: P2.3 R25.2 U1.6
P1.5: C11.1 R15.2 SW1.2 U1.7
P1.6: P5.2 U1.14
P2.3: C13.1 R19.2 SW3.2 U1.11
P2.4: P5.3 U1.12
P2.5: P5.4 U1.13
P2.6: P5.5 R24.1 U1.19
P2.7: C12.1 R17.2 SW2.2 U1.18
TDIO: C3.1 P1.4 R1.1 U1.16
TEST: P1.3 R2.2 U1.17
VSYS: C6.1 C7.1 L1.1 R5.2 R9.2 R12.2 U2.1 U3.6 U4.2 U5.7
pads on no net: J1.2 J1.3 J1.4 J1.MH1 J1.MH2 J1.Shell P3.MP1 P3.MP2 SW1.3 SW1.4 SW2.3 SW2.4 SW3.3 SW3.4 U1.8 U1.15 U3.4 U5.4 U5.9 U5.10 U5.11 U5.13
copper on no net:
  other v1: 2479.57,410.31 2515,410.31 2550.43,410.31 2479.57,449.69 2515,449.69 2550.43,449.69
  other v2: 237.75,95 237.75,1125 2685,1130

## Polygon pours and split planes (outlines as drawn)
GND on Top Layer "GND" (solid, shelved, pour order 1): 135,1220 3115,1220 3115,0 135,0
+3V3 on Bottom Layer "+3V3" (solid, shelved, pour order 2): 135,1220 3092.57,1220 3115,1197.57 3115,0 135,0

## Keep-outs
Keep-Out Layer:
  the board outline again, w10

## Text inside footprints (layer, text, board x,y; h text height)
J1: Top 3D Body "PCB Edge" at 95.08,561.18 h16 r270